# EAGLE board FLEXQCMV1.3 (EAGLE 7.2.0)
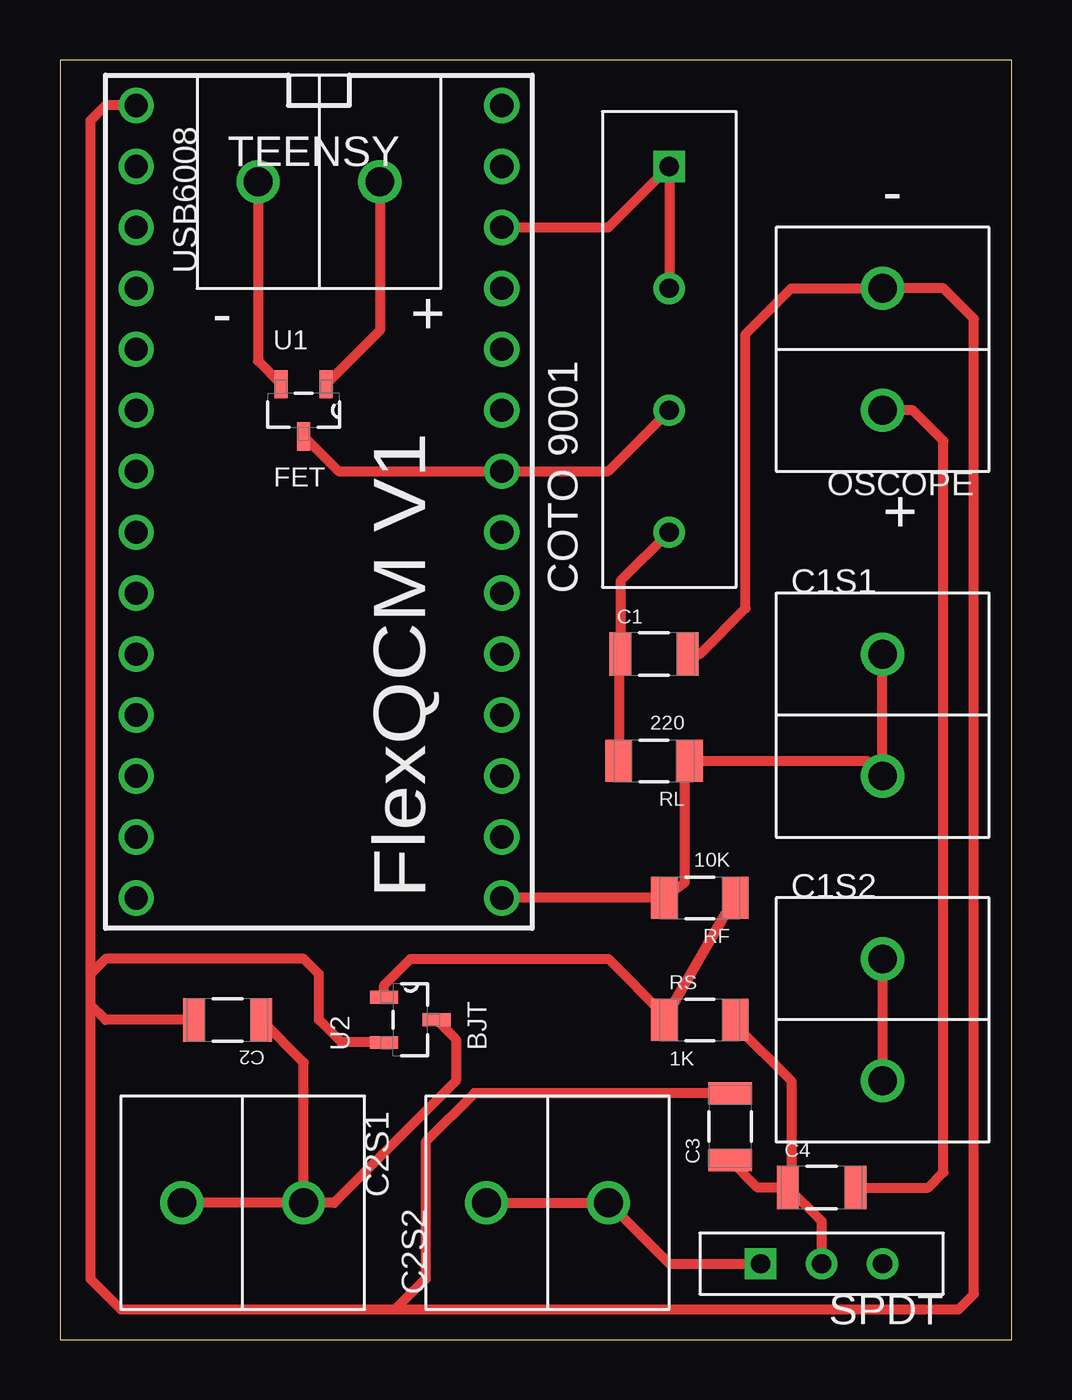
[diagram p0: board, top side]
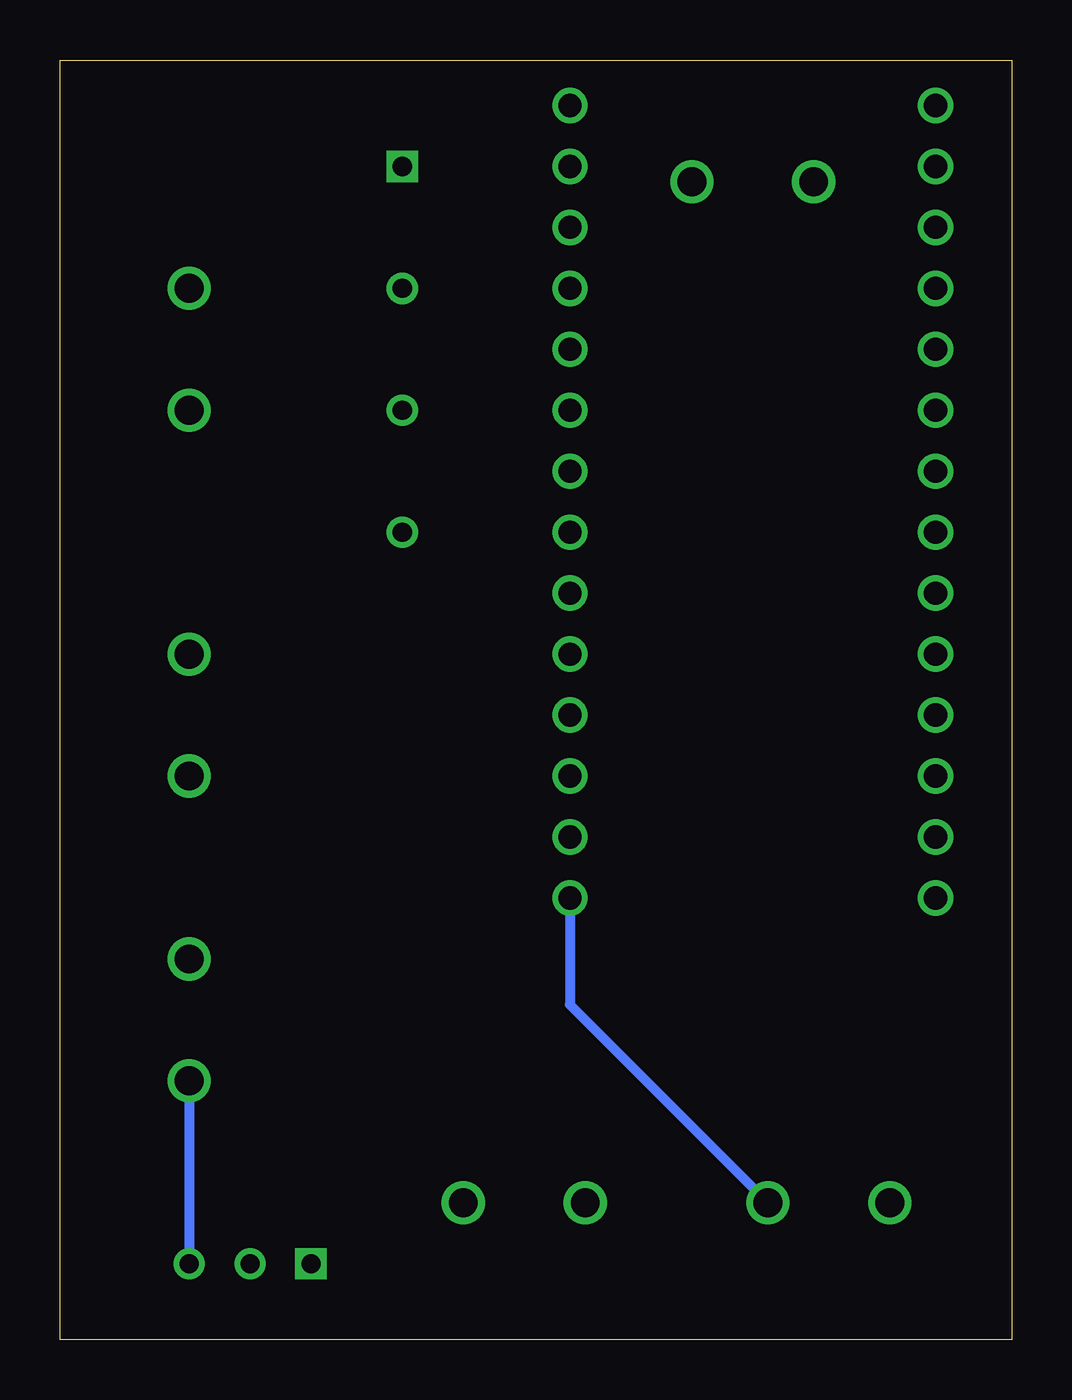
[diagram p1: board, bottom side, seen from below]

Size 39.67 x 53.33 mm. Coordinates in mm from the lower left corner, seen from the top.
Outline: 0,0 39.67,0 39.67,53.33 0,53.33 0,0
Copper layers (1*16): Top 0.035mm / dielectric 1.5mm / Bottom 0.035mm
Design rules "default": minimum track width 10mil, minimum drill 24mil, track to track 8mil, track to pad 8mil, pad to pad 8mil, via to via 8mil, smd to smd 8mil, copper to edge 40mil, drill to drill 8mil, minimum pad ring 10mil, minimum via ring 8mil, stop-mask expansion 4mil, vias tented up to drill 0mil, thermal gap 10mil

## Footprints (pad centres in the part's own frame; a part is rotated, then mirrored left to right if it is on the bottom)
CAPC3216X88N = smd 0.914 x 1.803: 1 -1.397,0; 2 1.397,0
TERMBLOCKX2 = drill 1.2: TB1 0,2.54; TB2 0,-2.54
COTO9001 = drill 0.8 square: R1 0,7.62 | drill 0.8: R2 0,2.54; R3 0,-2.54; R4 0,-7.62
RESC3216X71N = smd 1.118 x 1.753: 1 -1.473,0; 2 1.473,0
SPDTSWITCH = drill 0.8 square: SW1 0,2.54 | drill 0.8: SW2 0,0; SW3 0,-2.54
TEENSY3-DIL = drill 0.965: 0 -7.62,13.97; 1 -7.62,11.43; 2 -7.62,8.89; 3 -7.62,6.35; 3.3V 7.62,11.43; 4 -7.62,3.81; 5 -7.62,1.27; 6 -7.62,-1.27; 7 -7.62,-3.81; 8 -7.62,-6.35; 9 -7.62,-8.89; 10 -7.62,-11.43; 11 -7.62,-13.97; 12 -7.62,-16.51; 13 7.62,-16.51; 14/A0 7.62,-13.97; 15/A1 7.62,-11.43; 16/A2 7.62,-8.89; 17/A3 7.62,-6.35; 18/A4 7.62,-3.81; 19/A5 7.62,-1.27; 20/A6 7.62,1.27; 21/A7 7.62,3.81; 22/A8 7.62,6.35; 23/A9 7.62,8.89; AGND 7.62,13.97; GND -7.62,16.51; VIN 7.62,16.51
SOT95P230X110-3N = smd 1.168 x 0.533: 1 -1.092,0.94; 2 -1.092,-0.94; 3 1.092,0

## Placement (x,y rotation side)
C1  100n  [CAPC3216X88N]  24.77,28.58 0 top
C1S1  [TERMBLOCKX2]  34.29,26.04 0 top
C1S2  [TERMBLOCKX2]  34.29,13.33 0 top
C2  22pF  [CAPC3216X88N]  6.99,13.33 180 top
C2S1  [TERMBLOCKX2]  7.62,5.71 270 top
C2S2  [TERMBLOCKX2]  20.32,5.71 90 top
C3  22pF  [CAPC3216X88N]  27.94,8.89 90 top
C4  100n  [CAPC3216X88N]  31.75,6.35 0 top
COTO9001  [COTO9001]  25.4,41.27 0 top
OSCOPE  [TERMBLOCKX2]  34.29,41.27 180 top
RF  10K  [RESC3216X71N]  26.67,18.42 180 top
RL  220  [RESC3216X71N]  24.77,24.13 180 top
RS  1K  [RESC3216X71N]  26.67,13.33 0 top
SPDT  [SPDTSWITCH]  31.75,3.17 90 top
TEENSY  [TEENSY3-DIL]  10.79,34.92 0 top
U1  FET  [SOT95P230X110-3N]  10.16,38.73 270 top
U2  BJT  [SOT95P230X110-3N]  14.61,13.33 0 top
U$1  [ORNLLOGOV6]  11.43,18.42 90 top
USB6008  [TERMBLOCKX2]  10.79,48.26 90 top

## Library data of the parts
C1 C4 = Kemet_By_element14_Batch_1; MPN: C1206C104K1RACTU; OC_FARNELL: 1414714; OC_NEWARK: 85C2205; SUPPLIER: Kemet; TOLERANCE: ±10%; VOLTAGERATING: 100V
C1S1 C1S2 C2S1 C2S2 COTO9001 OSCOPE SPDT U$1 USB6008 = FLEXQCMLIBRARY
C2 C3 = Kemet_By_element14_Batch_1; MPN: C1206C220J5GACTU; OC_FARNELL: 1414717; OC_NEWARK: 70K9304; SUPPLIER: Kemet; TOLERANCE: ±5%; VOLTAGERATING: 50V
RF = Vishay_By_element14_Batch_1; MPN: CRCW120610K0FKEA; OC_FARNELL: 1469970; OC_NEWARK: 53K1907; SUPPLIER: Vishay; TOLERANCE: ±1%; WATTAGE: 0.25W
RL = Vishay_By_element14_Batch_1; MPN: CRCW1206220RJNEA; OC_FARNELL: -; OC_NEWARK: 59M6970; SUPPLIER: Vishay; TOLERANCE: ±5%; WATTAGE: 0.25W
RS = Vishay_By_element14_Batch_1; MPN: CRCW12061K00FKEA; OC_FARNELL: 1469965; OC_NEWARK: 53K1780; SUPPLIER: Vishay; TOLERANCE: ±1%; WATTAGE: 0.25W
TEENSY = Teensy_3_and_LC_Series_Boards_v1.0
U1 = NXP_By_element14_Batch_1; MPN: 2N7002K; OC_FARNELL: 1758065; OC_NEWARK: -; PACKAGE: SOT-3; SUPPLIER: NXP Semiconductors
U2 = NXP_By_element14_Batch_1

## Nets
3.3V: COTO9001.R1 COTO9001.R2 TEENSY.3.3V
13: C1S1.TB1 C1S1.TB2 C2.1 C2S1.TB1 C2S1.TB2 RF.2 RL.1 TEENSY.13 U2.3
20: COTO9001.R3 TEENSY.20/A6 U1.3
AGND: TEENSY.AGND
GND: C1.2 C2.2 C3.2 OSCOPE.TB2 TEENSY.GND U2.2
N$1: U1.1 USB6008.TB2
N$2: U1.2 USB6008.TB1
N$3: C1.1 COTO9001.R4 RL.2
N$4: C1S2.TB1 C1S2.TB2 SPDT.SW3
N$5: RF.1 RS.1 U2.1
N$6: C2S2.TB1 C2S2.TB2 SPDT.SW1
N$7: C3.1 C4.1 RS.2 SPDT.SW2
N$8: C4.2 OSCOPE.TB1
VIN: TEENSY.VIN

## Tracks (layer width: path | path; a pad name or v marks a point on that pad's centre or on a via)
3.3V
  Top 0.406: TEENSY.3.3V 22.86,46.35 COTO9001.R1 COTO9001.R2
13
  Top 0.406: C1S1.TB1 C1S1.TB2 33.66,24.13 RL.1 26.04,23.93 26.04,19.05 RF.2 TEENSY.13 | C2S1.TB1 C2S1.TB2 | C2S1.TB1 10.16,11.56 C2.1 | C2S1.TB1 11.43,5.71 16.51,10.79 16.51,12.52 U2.3
  Bottom 0.406: TEENSY.13 18.41,13.97 C2S1.TB1
20
  Top 0.406: U1.3 11.61,36.2 TEENSY.20/A6 22.86,36.2 COTO9001.R3
GND
  Top 0.406: TEENSY.GND 1.91,51.43 1.27,50.8 1.27,15.24 | 1.27,15.24 1.27,13.97 | 1.27,13.97 1.27,2.54 2.54,1.27 13.97,1.27 | 13.97,1.27 37.47,1.27 38.1,1.91 38.1,42.54 36.83,43.81 OSCOPE.TB2 30.48,43.81 28.57,41.91 28.57,30.48 26.67,28.58 C1.2 | C2.2 1.91,13.33 1.27,13.97 | C3.2 17.27,10.29 15.24,8.26 15.24,2.54 13.97,1.27 | U2.2 11.73,12.39 10.79,13.33 10.79,15.24 10.16,15.88 1.91,15.88 1.27,15.24
N$1
  Top 0.406: USB6008.TB2 13.34,42.06 U1.1
N$2
  Top 0.406: USB6008.TB1 8.26,40.79 U1.2
N$3
  Top 0.406: COTO9001.R4 23.37,31.62 C1.1 23.29,28.5 RL.2
N$4
  Top 0.406: C1S2.TB1 C1S2.TB2
  Bottom 0.406: C1S2.TB2 SPDT.SW3
N$5
  Top 0.406: U2.1 13.51,14.78 14.61,15.88 22.86,15.88 25.2,13.54 RS.1 RF.1
N$6
  Top 0.406: C2S2.TB1 C2S2.TB2 25.4,3.17 SPDT.SW1
N$7
  Top 0.406: SPDT.SW2 31.75,4.95 C4.1 | C4.1 29.08,6.35 C3.1 | RS.2 28.14,13.13 30.48,10.79 30.48,6.48 C4.1
N$8
  Top 0.406: C4.2 36.2,6.35 36.83,6.98 36.83,37.46 35.56,38.73 OSCOPE.TB1

## Text on the board
tPlace: - | - | + | + | FlexQCM V1